# Altium PCB PCB.PcbDoc
Units mm, origin at the board's own origin, x right, y up, seen from the top; angles counter-clockwise.
Board outline 22.3 x 12.55 mm, 2 copper layers (Top Layer, Bottom Layer); 15 components, 10 nets, 41 pads, 39 vias.
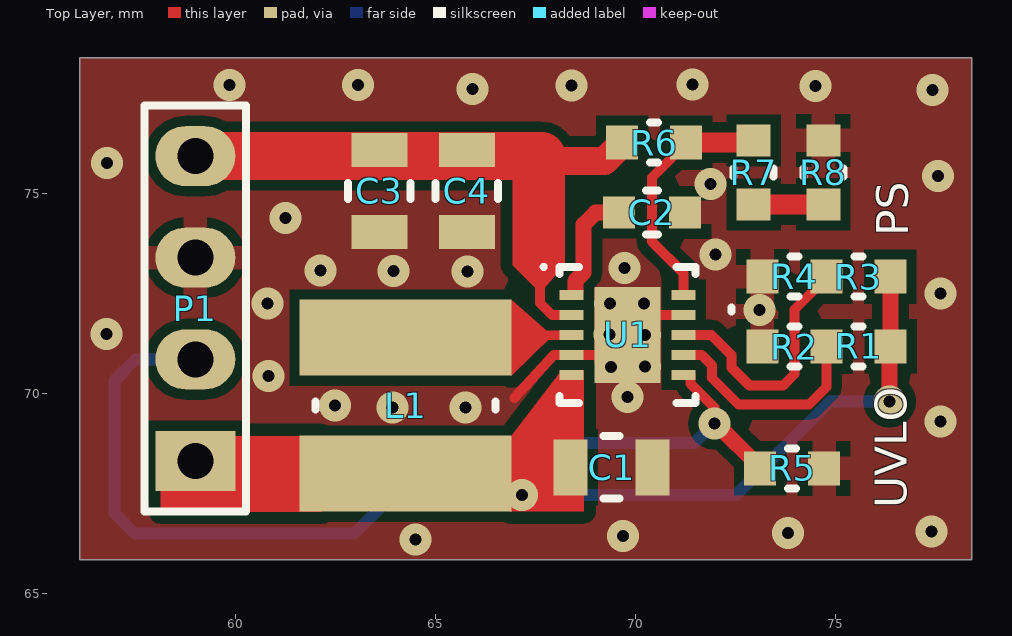
[diagram p0: Top Layer view]
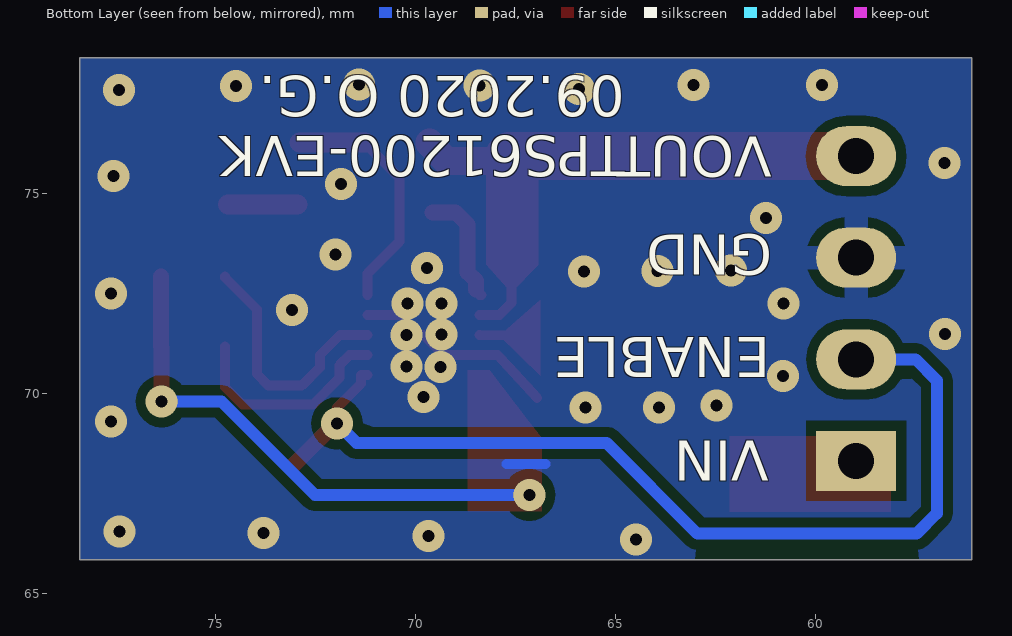
[diagram p1: Bottom Layer view, seen from below]

## Layer stack, top to bottom
Top Solder: solder mask 0.0102, Solder Resist, Dk 3.5
Top Layer: signal copper 0.0356
Dielectric 1: dielectric 0.32, FR-4, Dk 4.8
Bottom Layer: signal copper 0.0356
Bottom Solder: solder mask 0.0102, Solder Resist, Dk 3.5

## Board outline
56.1,78.4 56.1,65.85 78.4,65.85 78.4,78.4

## Design rules (kind name [scope] priority, off if disabled: settings)
Clearance [All] p1: gap=0.2 ignorepadtopadclearanceinfootprint=FALSE except(0.25: Arc-Fill Arc-Poly Arc-Region Track-Fill Track-Poly Track-Region SMDPad-Fill SMDPad-Poly SMDPad-Region THPad-Fill THPad-Poly THPad-Region Via-Fill Via-Poly Via-Region; 0.3: Fill-Fill Fill-Poly Fill-Region Poly-Poly Poly-Region Region-Region)
DiffPairsRouting [All] p1: maxlimit=0.254 minlimit=0.2 mostfreqgap=0.2 toplayer_minwidth=0.2 toplayer_maxwidth=0.381 toplayer_prefwidth=0.2 bottomlayer_minwidth=0.2 bottomlayer_maxwidth=0.381 bottomlayer_prefwidth=0.2 maxuncoupledlength=12.7
PolygonConnect [All] p1: thpad.connectstyle=Relief thpad.reliefconductorwidth=0.6 thpad.reliefentries=4 thpad.polygonreliefangle="90 Angle" thpad.airgapwidth=0.254 smdpad.connectstyle=Relief smdpad.reliefconductorwidth=0.6 smdpad.reliefentries=4 smdpad.polygonreliefangle="90 Angle" smdpad.airgapwidth=0.254 via.connectstyle=Direct via.reliefconductorwidth=0.254 via.reliefentries=4 via.polygonreliefangle="90 Angle" via.airgapwidth=0.254
RoomDefinition boost-dc-dc [InComponentClass('boost-dc-dc')] p1 off: confinementstyle=ConfineIn formatcopy=TRUE lockcomponents=FALSE outline 0,11.24 17.085,11.24 17.085,20.41 0,20.41
RoutingVias [All] p1: holewidth=0.3 width=0.8 viastyle="Through Hole" minholewidth=0.3 minwidth=0.7 maxholewidth=0.4 maxwidth=1
SolderMaskExpansion [All] p1: expansion=0.102
UnRoutedNet [All] p1: checkbadconnections=TRUE
Width [All] p1: maxlimit=2 minlimit=0.2 preferedwidth=0.25 minimp=50.000000 maximp=50.000000 favimp=50.000000
28 further rules are at their usual default settings.

## Components (designator, comment, footprint, x,y, rotation, side; value= is the part's Value field where it differs from the comment)
C1 "CAP_NPOL" C0805 69.4,68.16 r180 top locked value=10uF
C2 "CAP_NPOL" C0603 69.603,74.53 r0 top value=1uF
C3 "CAP_NPOL" C0805 63.59,75.07 r90 top value=10uF
C4 "CAP_NPOL" C0805 65.78,75.07 r90 top value=10uF
L1 "IND_W_IRON" CDRH4D28 64.25,69.7 r90 top locked value=2.2uH
P1 "HDR 4" PLS-4 58.99,68.32 r90 top locked
R1 "RES" R0603 75.57,71.18 r0 top value=0
R2 "RES" R0603 73.97,71.18 r0 top value=DNP
R3 "RES" R0603 75.57,72.93 r0 top value=0
R4 "RES" R0603 73.97,72.93 r0 top value=DNP
R5 "RES" R0603 73.91,68.13 r180 top value=100k
R6 "RES" R0603 70.46,76.28 r180 top value=1M
R7 "RES" R0603 72.95,75.53 r90 top value=150k
R8 "RES" R0603 74.69,75.53 r270 top value=30k
U1 "TPS6120x" VSON-10-3x3 69.8,71.47 r0 top locked

## Footprints (in the part's own frame and the unit in brackets; to place one, negate y for a bottom-side part, rotate by r counter-clockwise, add the part's x,y. Pads: shape width x height; smd on the part's side, far side on the other; paste and mask are expansions set on the pad)
C0603 [mm] "Chip Capacitor, 2-Leads, Body 1.60x0.80mm, IPC Medium Density"
  rect 0.8x0.8 smd: 1(1.627,0) 2(-0.023,0)
  silkscreen extent 0.65,-0.55 0.95,0.55, body extent 0,-0.4 1.6,0.4, height 0.8
C0805 [mm] "Chip Capacitor, 2-Leads, Body 2.00x1.25mm, IPC Medium Density"
  rect 0.85x1.4 smd: 1(-1.025,0) 2(1.025,0)
  silkscreen extent -0.2,-0.78 0.2,0.78, body extent -1,-0.63 1,0.63, height 1.25
CDRH4D28 [mm] "SMD Power Inductor CDRH4D28"
  rect 1.9x5.3 smd: 1(-1.7,0) 2(1.7,0)
  silkscreen extent -0.1,-2.25 0.1,2.25, body extent -2.35,-2.25 2.35,2.25, height 3.1
PLS-4 [mm] "Connector; Header; 4 Position"
  rect 1.5x2 hole 0.9: 1(0,0)
  oval 1.5x2 hole 0.9: 2(2.54,0) 3(5.08,0) 4(7.62,0)
  silkscreen extent -1.27,-1.27 8.89,1.27, body extent -1.27,-1.27 8.89,1.27, height 8.44
R0603 [mm] "Chip Resistor, 2-Leads, Body 1.60x0.80mm, IPC Medium Density"
  rect 0.8x0.85 smd: 1(-0.8,0) 2(0.8,0)
  silkscreen extent -0.1,-0.5 0.1,0.5, body extent -0.8,-0.4 0.8,0.4, height 0.8
VSON-10-3x3 [mm] "VSON, 10-Leads, Body 3.00x3.00mm, Pitch 0.50mm, Thermal Pad 2.40x1.65mm, IPC Medium Density"
  rect 0.6x0.25 smd: 1(-1.4,1) 2(-1.4,0.5) 3(-1.4,0) 4(-1.4,-0.5) 5(-1.4,-1) 6(1.4,-1) 7(1.4,-0.5) 8(1.4,0) 9(1.4,0.5) 10(1.4,1)
  rect 1.65x2.4 smd: 11(0,0)
  silkscreen extent -2.15,-1.7 1.7,1.75, body extent -1.56,-1.55 1.56,1.55, height 1

## Part data
P1: "Header, 4-Pin", LatestRevisionDate=17-Jul-2002, LatestRevisionNote="Re-released for DXP Platform.", Publisher="Altium Limited"
R1 R2 R3 R4 R5 R6 R7 R8: library part RESISTOR
U1: "Low Input Voltage Synchronous Boost Converter / With 1.3-A Switches"

## Via types
v1: diameter 0.8, hole 0.3, Top Layer to Bottom Layer, tented both sides, 39 vias

## Nets (pads, with @x,y where several pads share a name; then routed paths per layer and width w, separated by ;. In a path a pad name is that pad's centre, name@x,y a point inside that pad or via, vN(x,y) a via of type N, cw(c..) or ccw(c..) an arc to the next point about the centre after c; other vN are vias at no path point)
EN: P1.2 R5.2 U1.6 | length 25.2
  Top Layer w0.25: U1.6 71.37,70.47 71.37,70.25 71.97,69.65 v1(71.97,69.26) v1@72.005,69.26 ; R5.2 R5.2@73.11,68.155
  Top Layer w0.4: v1@72.005,69.26 R5.2@73.11,68.155
  Bottom Layer w0.3: P1.2 57.5,70.86 56.97,70.33 56.97,67.01 57.48,66.5 62.96,66.5 65.23,68.77 71.48,68.77 v1(71.97,69.26)
FB: R6.1 R7.2 U1.10 | length 6.2
  Top Layer w0.25: U1.10 71.2,73.01 70.41,73.8 70.41,75.405 71.26,76.255 R6.1 ; R7.2@72.9,76.28 R7.2
  Top Layer w0.5: R6.1 R7.2@72.9,76.28
GND: C1.1 C2.1 C3.1 C4.1 P1.3 R2.1 R4.1 R5.1 R8.1 U1.4 U1.9 U1.11 | length 5.4
  Top Layer w0.25: 66.966,69.896 67.678,70.665 67.955,70.965 U1.4 69.3,70.97 U1.11 ; U1.11@70.3,71.97 U1.9
  Bottom Layer w0.25: 66.76,68.24 67.73,68.24
  other v1: 64.49,66.36 69.68,66.44 73.81,66.52 77.4,66.56 77.62,69.3 63.92,69.66 65.75,69.66 62.48,69.7 69.8,69.92 60.82,70.44 69.38,70.67 70.23,70.68 69.35,71.48 70.23,71.47 56.77,71.49 73.09,72.09 60.8,72.26 69.36,72.26 70.21,72.26 77.62,72.51 65.79,73.06 62.12,73.08 63.95,73.07 69.72,73.14 72,73.48 61.24,74.39 71.87,75.24 77.56,75.44 56.78,75.77 77.42,77.59 65.92,77.62 68.4,77.71 74.49,77.69 59.84,77.72 63.06,77.72 71.42,77.73
NetC2_2: C2.2 U1.1 | length 2.7
  Top Layer w0.25: U1.1@68.35,72.47 U1.1
  Top Layer w0.4: 68.49,72.6 68.49,72.82 68.7,73.03 68.7,74.2 ; 68.7,74.23 69,74.53 C2.2
NetL1_2: L1.2 U1.3 | length 0.9
  Top Layer w0.25: 67.54,71.46 U1.3
NetR7_1: R7.1 R8.2 | length 1.7
  Top Layer w0.5: R7.1 R8.2
PS: R3.1 R4.2 U1.8 | length 6.4
  Top Layer w0.25: U1.8 71.89,71.47 72.39,70.97 72.39,70.66 72.85,70.2 73.68,70.2 73.97,70.49 73.97,72.105 74.77,72.905 R3.1
UVLO: R1.1 R2.2 U1.7 | length 5.5
  Top Layer w0.25: U1.7 71.65,70.97 71.91,70.71 71.91,70.39 72.57,69.73 74.33,69.73 74.77,70.17 R1.1
VIN: C1.2 L1.1 P1.1 R1.2 R3.2 U1.5 | length 13.3
  Top Layer w0.25: R1.2@76.35,71.16 R1.2
  Top Layer w0.4: v1(76.35,69.81) R1.2@76.35,71.16 ; R1.2 R3.2
  Bottom Layer w0.3: v1(67.16,67.47) 72.52,67.47 74.86,69.81 v1(76.35,69.81)
VOUT_3V3: C3.2 C4.2 P1.4 R6.2 U1.2 | length 12.4
  Top Layer w0.25: 67.61,72.79 67.61,72.27 67.91,71.97 U1.2
  Top Layer w0.7: 67.65,75.94 67.77,75.82 69.225,75.82 69.66,76.255 R6.2
  Top Layer w1.2: P1.4 67.65,75.94

## Polygon pours and split planes (outlines as drawn)
GND on Top Layer "GND_L01_P004" (solid, remove dead copper, pour order 4): 56.1,78.4 56.1,65.85 78.4,65.85 78.4,78.4
GND on Bottom Layer "GND_L02_P006" (solid, remove dead copper, pour order 6): 56.1,78.4 56.1,65.85 78.4,65.85 78.4,78.4

## Other copper
Top Layer:
  region net VOUT_3V3: 67.61,72.53 66.93,73.21 66.93,75.94 68.23,75.94 68.23,73.22
  region net VIN: 58.13,68.94 62.15,68.94 62.15,67.05 58.13,67.05
  region net VIN: 66.85,68.887 68.148,70.59 68.7,70.59 68.7,67.06 66.85,67.06
  region net NetL1_2: 66.89,72.35 66.89,70.45 67.91,71.45

## Silkscreen, mask and mechanical layers (free items; w line width, h text height)
Top Overlay:
  lines w0.2: 72.4,72.06 72.4,72.15
  text "PS" at 76.81,73.94 h0.8 r90
  text "UVLO" at 76.78,67.14 h0.8 r90
Bottom Overlay:
  text "TPS61200-EVK / 09.2020 O.G." at 64.77,77.94 h1 r180
  text "VOUT" at 61.1,76.43 h1 r180
  text "GND" at 61.09,73.97 h1 r180
  text "ENABLE" at 61.14,71.41 h1 r180
  text "VIN" at 61.18,68.83 h1 r180
Mechanical 1:
  lines w0.2: 55.71,65.48 55.71,78.78 78.77,78.78 78.77,65.48 55.71,65.48